# EAGLE board version_0_test___ (EAGLE 6.5.0)

Size 76.2 x 36.83 mm. Coordinates in mm from the lower left corner, seen from the top.
Outline: 0,0 76.2,0 76.2,36.83 0,36.83 0,0
Copper layers (1*16): Top 0.035mm / dielectric 1.5mm / Bottom 0.035mm
Design rules "default": minimum track width 10mil, minimum drill 24mil, track to track 8mil, track to pad 8mil, pad to pad 8mil, via to via 8mil, smd to smd 8mil, copper to edge 40mil, drill to drill 8mil, minimum pad ring 10mil, minimum via ring 8mil, stop-mask expansion 4mil, vias tented up to drill 0mil, thermal gap 10mil
Milling: area 54.6,23.4 to 76.1,36.8

## Footprints (pad centres in the part's own frame; a part is rotated, then mirrored left to right if it is on the bottom)
SMD2,54-5,08 = smd 2.54 x 5.08: 1 0,0
DOORSENSOR = drill 0.9 pad 1.93 long: GND 0,6.35; L1 -5.08,6.35; L2 -2.54,6.35; R1 5.08,6.35; R2 2.54,6.35
DIL16 = drill 0.813 long: 1 -8.89,-3.81; 2 -6.35,-3.81; 3 -3.81,-3.81; 4 -1.27,-3.81; 5 1.27,-3.81; 6 3.81,-3.81; 7 6.35,-3.81; 8 8.89,-3.81; 9 8.89,3.81; 10 6.35,3.81; 11 3.81,3.81; 12 1.27,3.81; 13 -1.27,3.81; 14 -3.81,3.81; 15 -6.35,3.81; 16 -8.89,3.81

## Placement (x,y rotation side)
DOOR_BLACK_OUT  [SMD2,54-5,08]  -15.24,-8.89 0 top  (outside the outline)
DOOR_PWM_1_IN  [SMD2,54-5,08]  -19.81,-8.89 0 top  (outside the outline)
DOOR_RED_OUT  [SMD2,54-5,08]  -10.67,-8.89 0 top  (outside the outline)
DOORSENSOR  DOORSENSOR  [DOORSENSOR]  54.61,23.37 0 top
IC1  L293E  [DIL16]  24.89,21.84 270 top
LED_PWM_2_IN  [SMD2,54-5,08]  -24.38,-8.89 0 top  (outside the outline)
S_CLOSED  [SMD2,54-5,08]  -1.52,-8.89 0 top  (outside the outline)
S_OPEN  [SMD2,54-5,08]  -6.1,-8.89 0 top  (outside the outline)

## Library data of the parts
DOOR_BLACK_OUT DOOR_PWM_1_IN DOOR_RED_OUT LED_PWM_2_IN S_CLOSED S_OPEN = wirepad
DOORSENSOR = custom_components
IC1 = texas; MF: Arrow Electronics; MPN: L293E; OC_FARNELL: 1467711; OC_NEWARK: 89K0732

## Nets
N$1: DOORSENSOR.GND IC1.4 IC1.5 IC1.12 IC1.13
N$2: IC1.8
N$3: DOORSENSOR.L1 S_CLOSED.1
N$4: DOORSENSOR.R1 S_OPEN.1
N$5: DOOR_BLACK_OUT.1 IC1.6
N$6: DOOR_RED_OUT.1 IC1.3
N$7: IC1.9 LED_PWM_2_IN.1
N$8: DOOR_PWM_1_IN.1
VCC: IC1.16

## Tracks (layer width: path | path; a pad name or v marks a point on that pad's centre or on a via)
N$1  (4 unrouted)
N$3  (1 unrouted)
N$4  (1 unrouted)
N$5  (1 unrouted)
N$6  (1 unrouted)
N$7  (1 unrouted)